# EAGLE board Qwiic_TMF8801-Panel (EAGLE 9.6.2), part 1 of 2
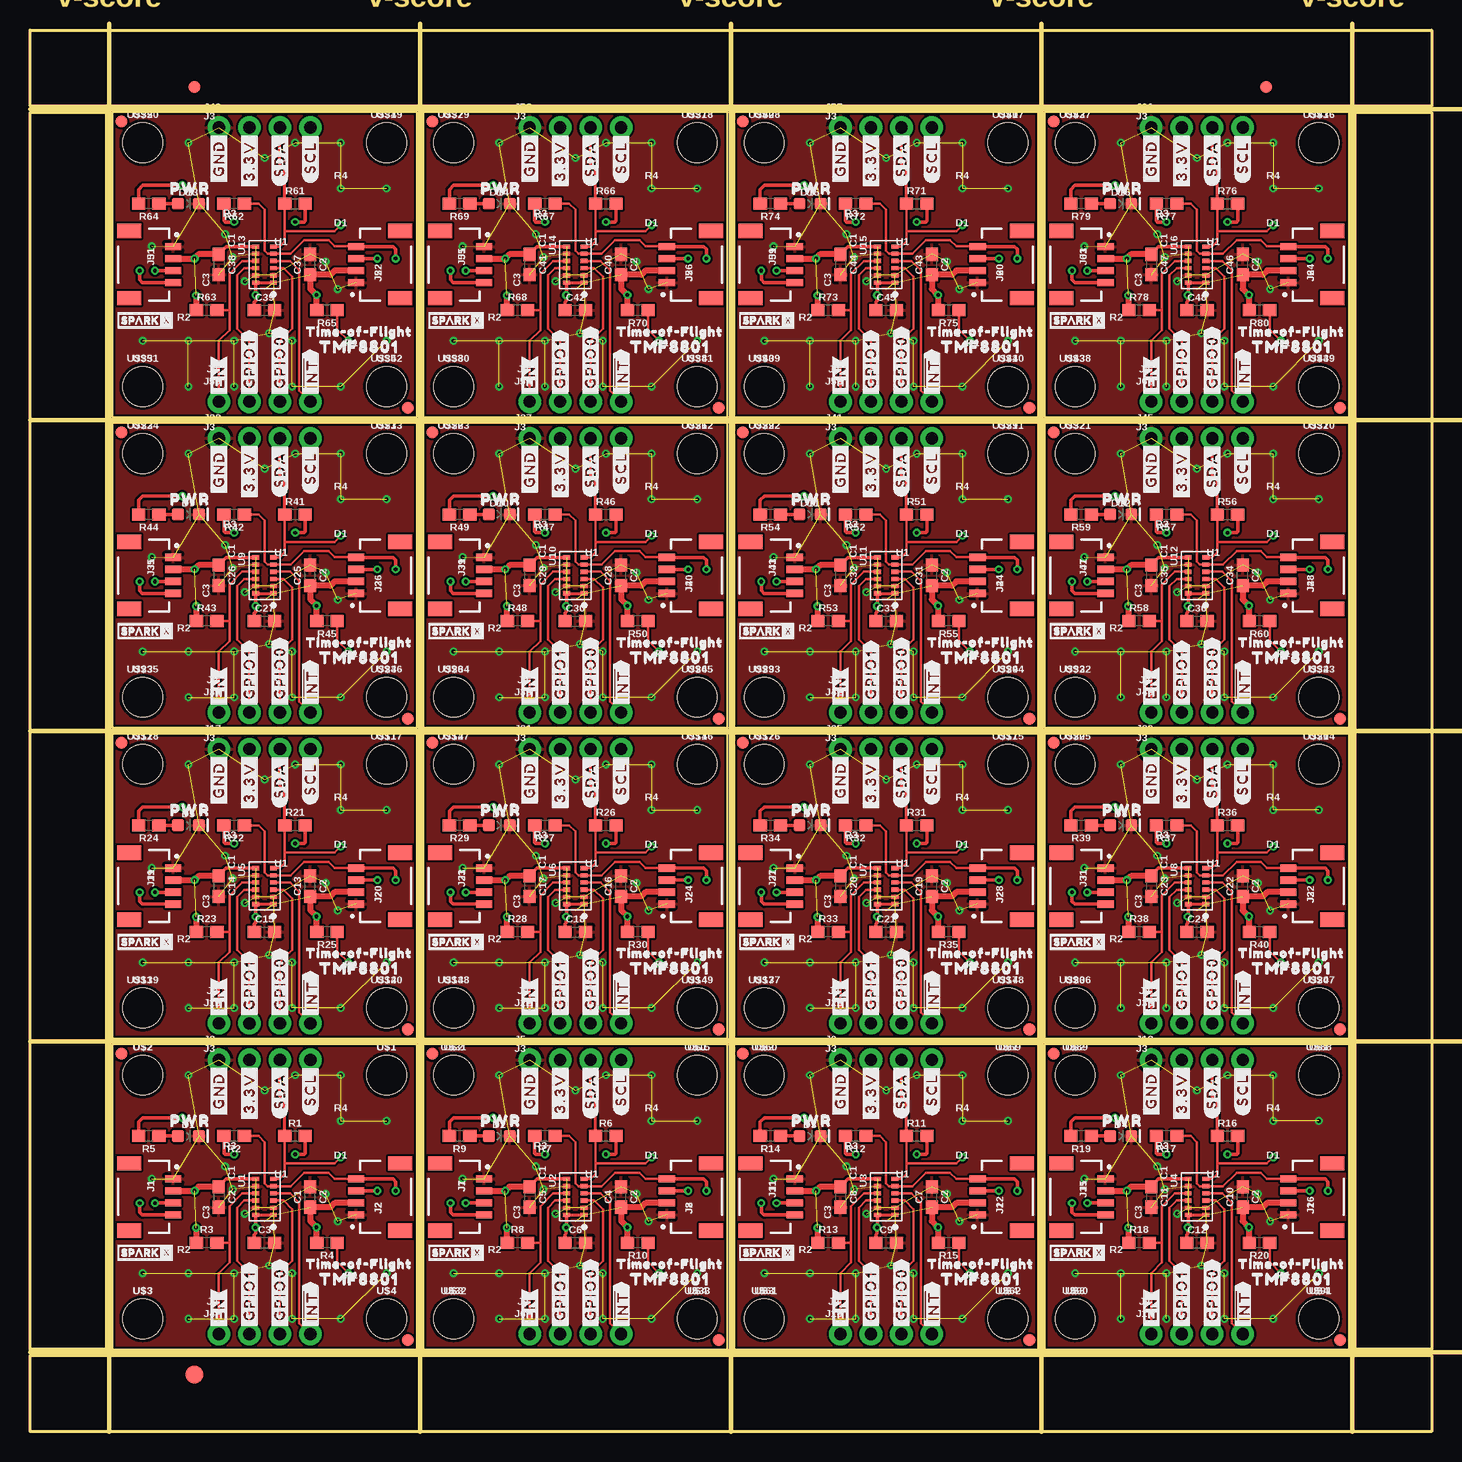
[diagram p0: board, top side]
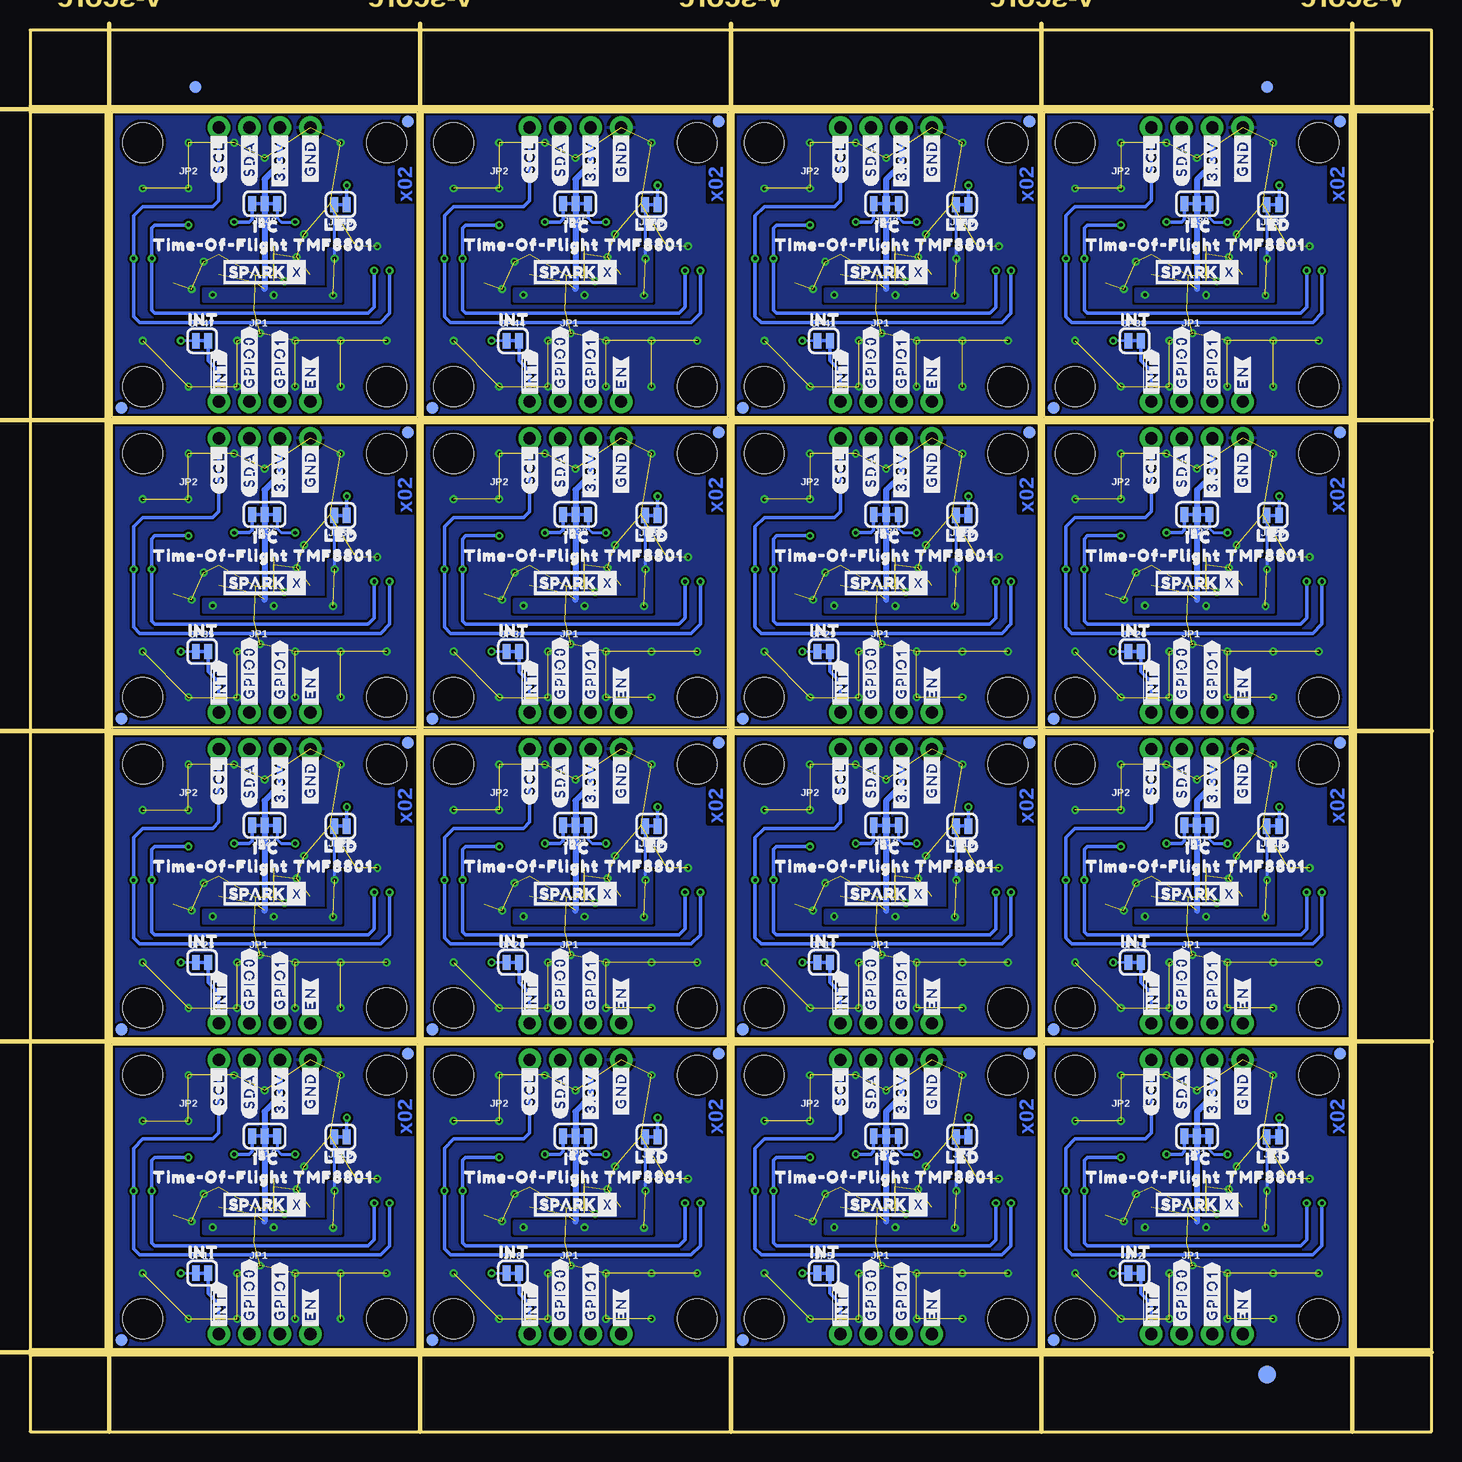
[diagram p1: board, bottom side, seen from below]

Size 116.84 x 116.84 mm. Coordinates in mm from the lower left corner, seen from the top.
Outline: 6.86,6.86 32.26,6.86 32.26,32.26 6.86,32.26 6.86,6.86
Outline: 32.77,6.86 58.17,6.86 58.17,32.26 32.77,32.26 32.77,6.86
Outline: 58.67,6.86 84.07,6.86 84.07,32.26 58.67,32.26 58.67,6.86
Outline: 84.58,6.86 109.98,6.86 109.98,32.26 84.58,32.26 84.58,6.86
Outline: 6.86,32.77 32.26,32.77 32.26,58.17 6.86,58.17 6.86,32.77
Outline: 32.77,32.77 58.17,32.77 58.17,58.17 32.77,58.17 32.77,32.77
Outline: 58.67,32.77 84.07,32.77 84.07,58.17 58.67,58.17 58.67,32.77
Outline: 84.58,32.77 109.98,32.77 109.98,58.17 84.58,58.17 84.58,32.77
Outline: 6.86,58.67 32.26,58.67 32.26,84.07 6.86,84.07 6.86,58.67
Outline: 32.77,58.67 58.17,58.67 58.17,84.07 32.77,84.07 32.77,58.67
Outline: 58.67,58.67 84.07,58.67 84.07,84.07 58.67,84.07 58.67,58.67
Outline: 84.58,58.67 109.98,58.67 109.98,84.07 84.58,84.07 84.58,58.67
Outline: 6.86,84.58 32.26,84.58 32.26,109.98 6.86,109.98 6.86,84.58
Outline: 32.77,84.58 58.17,84.58 58.17,109.98 32.77,109.98 32.77,84.58
Outline: 58.67,84.58 84.07,84.58 84.07,109.98 58.67,109.98 58.67,84.58
Outline: 84.58,84.58 109.98,84.58 109.98,109.98 84.58,109.98 84.58,84.58
Outline: 0,6.35 116.84,6.35 116.84,0 0,0 0,6.35
Outline: 110.49,109.98 116.84,109.98 116.84,6.86 110.49,6.86 110.49,109.98
Outline: 0,116.84 116.84,116.84 116.84,110.49 0,110.49 0,116.84
Outline: 0,109.98 6.35,109.98 6.35,6.86 0,6.86 0,109.98
Copper layers (1*16): Top 0.035mm / dielectric 1.5mm / Bottom 0.035mm
Design rules "Qwiic_TMF8801": minimum track width 7mil, minimum drill 12mil, track to track 7mil, track to pad 7mil, pad to pad 7mil, via to via 7mil, smd to smd 7mil, copper to edge 7mil, drill to drill 7mil, minimum pad ring 7mil, minimum via ring 7mil, stop-mask expansion 4mil, vias tented up to drill 25mil, thermal gap 10mil
Milling: 10 lines

## Footprints (pad centres in the part's own frame; a part is rotated, then mirrored left to right if it is on the bottom)
0603 = smd 1.1 x 1: 1 -0.85,0; 2 0.85,0
LED-0603 = smd 1 x 1: A -0.877,0; C 0.877,0
FIDUCIAL-1X2 = smd 1 x 1: 1 0,0
FIDUCIAL-1.5X3 = smd 1.5 x 1.5: 1 0,0
JST04_1MM_RA = smd 0.6 x 1.35: 1 -1.5,0; 2 -0.5,0; 3 0.5,0; 4 1.5,0 | smd 1.2 x 2: NC1 2.8,-3.675; NC2 -2.8,-3.675
1X04_NO_SILK = drill 1.016 pad 1.88: 1 0,0; 2 2.54,0; 3 5.08,0; 4 7.62,0
SMT-JUMPER_3_2-NC_TRACE_SILK = smd 0.66 x 1.27: 1 -1.041,0; 2 0,0; 3 1.041,0
SMT-JUMPER_2_NC_TRACE_SILK = smd 0.66 x 1.27: 1 -0.521,0; 2 0.521,0
TMF8801-CUSTOM = smd 0.35 x 0.575: 1 -1.5,-0.738; 2 -0.9,-0.738; 3 -0.3,-0.738; 4 0.3,-0.738; 5 0.9,-0.738; 6 1.5,-0.738; 7 1.5,0.738; 8 0.9,0.738; 9 0.3,0.738; 10 -0.3,0.738; 11 -0.9,0.738; 12 -1.5,0.738
STAND-OFF = hole 3.302: 0,0

## Placement (x,y rotation side)
C1  0.1uF  [0603]  23.37,19.56 90 top
C2  0.1uF  [0603]  15.75,19.56 270 top
C3  0.1uF  [0603]  19.56,15.75 0 top
C4  0.1uF  [0603]  49.28,19.56 90 top
C5  0.1uF  [0603]  41.66,19.56 270 top
C6  0.1uF  [0603]  45.47,15.75 0 top
C7  0.1uF  [0603]  75.18,19.56 90 top
C8  0.1uF  [0603]  67.56,19.56 270 top
C9  0.1uF  [0603]  71.37,15.75 0 top
C10  0.1uF  [0603]  101.09,19.56 90 top
C11  0.1uF  [0603]  93.47,19.56 270 top
C12  0.1uF  [0603]  97.28,15.75 0 top
C13  0.1uF  [0603]  23.37,45.47 90 top
C14  0.1uF  [0603]  15.75,45.47 270 top
C15  0.1uF  [0603]  19.56,41.66 0 top
C16  0.1uF  [0603]  49.28,45.47 90 top
C17  0.1uF  [0603]  41.66,45.47 270 top
C18  0.1uF  [0603]  45.47,41.66 0 top
C19  0.1uF  [0603]  75.18,45.47 90 top
C20  0.1uF  [0603]  67.56,45.47 270 top
C21  0.1uF  [0603]  71.37,41.66 0 top
C22  0.1uF  [0603]  101.09,45.47 90 top
C23  0.1uF  [0603]  93.47,45.47 270 top
C24  0.1uF  [0603]  97.28,41.66 0 top
C25  0.1uF  [0603]  23.37,71.37 90 top
C26  0.1uF  [0603]  15.75,71.37 270 top
C27  0.1uF  [0603]  19.56,67.56 0 top
C28  0.1uF  [0603]  49.28,71.37 90 top
C29  0.1uF  [0603]  41.66,71.37 270 top
C30  0.1uF  [0603]  45.47,67.56 0 top
C31  0.1uF  [0603]  75.18,71.37 90 top
C32  0.1uF  [0603]  67.56,71.37 270 top
C33  0.1uF  [0603]  71.37,67.56 0 top
C34  0.1uF  [0603]  101.09,71.37 90 top
C35  0.1uF  [0603]  93.47,71.37 270 top
C36  0.1uF  [0603]  97.28,67.56 0 top
C37  0.1uF  [0603]  23.37,97.28 90 top
C38  0.1uF  [0603]  15.75,97.28 270 top
C39  0.1uF  [0603]  19.56,93.47 0 top
C40  0.1uF  [0603]  49.28,97.28 90 top
C41  0.1uF  [0603]  41.66,97.28 270 top
C42  0.1uF  [0603]  45.47,93.47 0 top
C43  0.1uF  [0603]  75.18,97.28 90 top
C44  0.1uF  [0603]  67.56,97.28 270 top
C45  0.1uF  [0603]  71.37,93.47 0 top
C46  0.1uF  [0603]  101.09,97.28 90 top
C47  0.1uF  [0603]  93.47,97.28 270 top
C48  0.1uF  [0603]  97.28,93.47 0 top
D1  RED  [LED-0603]  13.21,24.64 0 top
D2  RED  [LED-0603]  39.12,24.64 0 top
D3  RED  [LED-0603]  65.02,24.64 0 top
D4  RED  [LED-0603]  90.93,24.64 0 top
D5  RED  [LED-0603]  13.21,50.55 0 top
D6  RED  [LED-0603]  39.12,50.55 0 top
D7  RED  [LED-0603]  65.02,50.55 0 top
D8  RED  [LED-0603]  90.93,50.55 0 top
D9  RED  [LED-0603]  13.21,76.45 0 top
D10  RED  [LED-0603]  39.12,76.45 0 top
D11  RED  [LED-0603]  65.02,76.45 0 top
D12  RED  [LED-0603]  90.93,76.45 0 top
D13  RED  [LED-0603]  13.21,102.36 0 top
D14  RED  [LED-0603]  39.12,102.36 0 top
D15  RED  [LED-0603]  65.02,102.36 0 top
D16  RED  [LED-0603]  90.93,102.36 0 top
E$1  [FIDUCIAL-1X2]  13.72,112.08 0 top
E$2  [FIDUCIAL-1X2]  13.72,112.08 0 bottom
E$3  [FIDUCIAL-1X2]  103.06,112.08 0 top
E$4  [FIDUCIAL-1X2]  103.06,112.08 0 bottom
E$5  [FIDUCIAL-1.5X3]  13.72,4.76 0 top
E$6  [FIDUCIAL-1.5X3]  13.72,4.76 0 bottom
FD1  FIDUCIAL1X2  [FIDUCIAL-1X2]  7.62,31.5 0 top
FD2  FIDUCIAL1X2  [FIDUCIAL-1X2]  7.62,31.5 0 bottom
FD3  FIDUCIAL1X2  [FIDUCIAL-1X2]  31.5,7.62 0 top
FD4  FIDUCIAL1X2  [FIDUCIAL-1X2]  31.5,7.62 0 bottom
FD5  FIDUCIAL1X2  [FIDUCIAL-1X2]  33.53,31.5 0 top
FD6  FIDUCIAL1X2  [FIDUCIAL-1X2]  57.4,7.62 0 top
FD7  FIDUCIAL1X2  [FIDUCIAL-1X2]  57.4,7.62 0 bottom
FD8  FIDUCIAL1X2  [FIDUCIAL-1X2]  33.53,31.5 0 bottom
FD9  FIDUCIAL1X2  [FIDUCIAL-1X2]  59.44,31.5 0 top
FD10  FIDUCIAL1X2  [FIDUCIAL-1X2]  83.31,7.62 0 top
FD11  FIDUCIAL1X2  [FIDUCIAL-1X2]  83.31,7.62 0 bottom
FD12  FIDUCIAL1X2  [FIDUCIAL-1X2]  59.44,31.5 0 bottom
FD13  FIDUCIAL1X2  [FIDUCIAL-1X2]  85.34,31.5 0 top
FD14  FIDUCIAL1X2  [FIDUCIAL-1X2]  109.22,7.62 0 top
FD15  FIDUCIAL1X2  [FIDUCIAL-1X2]  109.22,7.62 0 bottom
FD16  FIDUCIAL1X2  [FIDUCIAL-1X2]  85.34,31.5 0 bottom
FD17  FIDUCIAL1X2  [FIDUCIAL-1X2]  7.62,57.4 0 top
FD18  FIDUCIAL1X2  [FIDUCIAL-1X2]  31.5,33.53 0 top
FD19  FIDUCIAL1X2  [FIDUCIAL-1X2]  31.5,33.53 0 bottom
FD20  FIDUCIAL1X2  [FIDUCIAL-1X2]  7.62,57.4 0 bottom
FD21  FIDUCIAL1X2  [FIDUCIAL-1X2]  33.53,57.4 0 top
FD22  FIDUCIAL1X2  [FIDUCIAL-1X2]  57.4,33.53 0 top
FD23  FIDUCIAL1X2  [FIDUCIAL-1X2]  57.4,33.53 0 bottom
FD24  FIDUCIAL1X2  [FIDUCIAL-1X2]  33.53,57.4 0 bottom
FD25  FIDUCIAL1X2  [FIDUCIAL-1X2]  59.44,57.4 0 top
FD26  FIDUCIAL1X2  [FIDUCIAL-1X2]  83.31,33.53 0 top
FD27  FIDUCIAL1X2  [FIDUCIAL-1X2]  83.31,33.53 0 bottom
FD28  FIDUCIAL1X2  [FIDUCIAL-1X2]  59.44,57.4 0 bottom
FD29  FIDUCIAL1X2  [FIDUCIAL-1X2]  85.34,57.4 0 top
FD30  FIDUCIAL1X2  [FIDUCIAL-1X2]  109.22,33.53 0 top
FD31  FIDUCIAL1X2  [FIDUCIAL-1X2]  109.22,33.53 0 bottom
FD32  FIDUCIAL1X2  [FIDUCIAL-1X2]  85.34,57.4 0 bottom
FD33  FIDUCIAL1X2  [FIDUCIAL-1X2]  7.62,83.31 0 top
FD34  FIDUCIAL1X2  [FIDUCIAL-1X2]  31.5,59.44 0 top
FD35  FIDUCIAL1X2  [FIDUCIAL-1X2]  31.5,59.44 0 bottom
FD36  FIDUCIAL1X2  [FIDUCIAL-1X2]  7.62,83.31 0 bottom
FD37  FIDUCIAL1X2  [FIDUCIAL-1X2]  33.53,83.31 0 top
FD38  FIDUCIAL1X2  [FIDUCIAL-1X2]  57.4,59.44 0 top
FD39  FIDUCIAL1X2  [FIDUCIAL-1X2]  57.4,59.44 0 bottom
FD40  FIDUCIAL1X2  [FIDUCIAL-1X2]  33.53,83.31 0 bottom
FD41  FIDUCIAL1X2  [FIDUCIAL-1X2]  59.44,83.31 0 top
FD42  FIDUCIAL1X2  [FIDUCIAL-1X2]  83.31,59.44 0 top
FD43  FIDUCIAL1X2  [FIDUCIAL-1X2]  83.31,59.44 0 bottom
FD44  FIDUCIAL1X2  [FIDUCIAL-1X2]  59.44,83.31 0 bottom
FD45  FIDUCIAL1X2  [FIDUCIAL-1X2]  85.34,83.31 0 top
FD46  FIDUCIAL1X2  [FIDUCIAL-1X2]  109.22,59.44 0 top
FD47  FIDUCIAL1X2  [FIDUCIAL-1X2]  109.22,59.44 0 bottom
FD48  FIDUCIAL1X2  [FIDUCIAL-1X2]  85.34,83.31 0 bottom
FD49  FIDUCIAL1X2  [FIDUCIAL-1X2]  7.62,109.22 0 top
FD50  FIDUCIAL1X2  [FIDUCIAL-1X2]  31.5,85.34 0 top
FD51  FIDUCIAL1X2  [FIDUCIAL-1X2]  31.5,85.34 0 bottom
FD52  FIDUCIAL1X2  [FIDUCIAL-1X2]  7.62,109.22 0 bottom
FD53  FIDUCIAL1X2  [FIDUCIAL-1X2]  33.53,109.22 0 top
FD54  FIDUCIAL1X2  [FIDUCIAL-1X2]  57.4,85.34 0 top
FD55  FIDUCIAL1X2  [FIDUCIAL-1X2]  57.4,85.34 0 bottom
FD56  FIDUCIAL1X2  [FIDUCIAL-1X2]  33.53,109.22 0 bottom
FD57  FIDUCIAL1X2  [FIDUCIAL-1X2]  59.44,109.22 0 top
FD58  FIDUCIAL1X2  [FIDUCIAL-1X2]  83.31,85.34 0 top
FD59  FIDUCIAL1X2  [FIDUCIAL-1X2]  83.31,85.34 0 bottom
FD60  FIDUCIAL1X2  [FIDUCIAL-1X2]  59.44,109.22 0 bottom
FD61  FIDUCIAL1X2  [FIDUCIAL-1X2]  85.34,109.22 0 top
FD62  FIDUCIAL1X2  [FIDUCIAL-1X2]  109.22,85.34 0 top
FD63  FIDUCIAL1X2  [FIDUCIAL-1X2]  109.22,85.34 0 bottom
FD64  FIDUCIAL1X2  [FIDUCIAL-1X2]  85.34,109.22 0 bottom
FRAME1  FRAME-LETTERNO_PACKAGE  [DUMMY]  6.6,6.35 0 top
FRAME2  FRAME-LETTERNO_PACKAGE  [DUMMY]  32.51,6.35 0 top
FRAME3  FRAME-LETTERNO_PACKAGE  [DUMMY]  58.42,6.35 0 top
FRAME4  FRAME-LETTERNO_PACKAGE  [DUMMY]  84.33,6.35 0 top
FRAME5  FRAME-LETTERNO_PACKAGE  [DUMMY]  6.6,32.26 0 top
FRAME6  FRAME-LETTERNO_PACKAGE  [DUMMY]  32.51,32.26 0 top
FRAME7  FRAME-LETTERNO_PACKAGE  [DUMMY]  58.42,32.26 0 top
FRAME8  FRAME-LETTERNO_PACKAGE  [DUMMY]  84.33,32.26 0 top
FRAME9  FRAME-LETTERNO_PACKAGE  [DUMMY]  6.6,58.17 0 top
FRAME10  FRAME-LETTERNO_PACKAGE  [DUMMY]  32.51,58.17 0 top
FRAME11  FRAME-LETTERNO_PACKAGE  [DUMMY]  58.42,58.17 0 top
FRAME12  FRAME-LETTERNO_PACKAGE  [DUMMY]  84.33,58.17 0 top
FRAME13  FRAME-LETTERNO_PACKAGE  [DUMMY]  6.6,84.07 0 top
FRAME14  FRAME-LETTERNO_PACKAGE  [DUMMY]  32.51,84.07 0 top
FRAME15  FRAME-LETTERNO_PACKAGE  [DUMMY]  58.42,84.07 0 top
FRAME16  FRAME-LETTERNO_PACKAGE  [DUMMY]  84.33,84.07 0 top
J1  Qwiic  [JST04_1MM_RA]  11.94,19.56 270 top
J2  Qwiic  [JST04_1MM_RA]  27.18,19.56 90 top
J3  [1X04_NO_SILK]  15.75,30.99 0 top
J4  [1X04_NO_SILK]  15.75,8.13 0 top
J5  [1X04_NO_SILK]  41.66,30.99 0 top
J6  [1X04_NO_SILK]  41.66,8.13 0 top
J7  Qwiic  [JST04_1MM_RA]  37.85,19.56 270 top
J8  Qwiic  [JST04_1MM_RA]  53.09,19.56 90 top
J9  [1X04_NO_SILK]  67.56,30.99 0 top
J10  [1X04_NO_SILK]  67.56,8.13 0 top
J11  Qwiic  [JST04_1MM_RA]  63.75,19.56 270 top
J12  Qwiic  [JST04_1MM_RA]  78.99,19.56 90 top
J13  [1X04_NO_SILK]  93.47,30.99 0 top
J14  [1X04_NO_SILK]  93.47,8.13 0 top
J15  Qwiic  [JST04_1MM_RA]  89.66,19.56 270 top
J16  Qwiic  [JST04_1MM_RA]  104.9,19.56 90 top
J17  [1X04_NO_SILK]  15.75,56.9 0 top
J18  [1X04_NO_SILK]  15.75,34.04 0 top
J19  Qwiic  [JST04_1MM_RA]  11.94,45.47 270 top
J20  Qwiic  [JST04_1MM_RA]  27.18,45.47 90 top
J21  [1X04_NO_SILK]  41.66,56.9 0 top
J22  [1X04_NO_SILK]  41.66,34.04 0 top
J23  Qwiic  [JST04_1MM_RA]  37.85,45.47 270 top
J24  Qwiic  [JST04_1MM_RA]  53.09,45.47 90 top
J25  [1X04_NO_SILK]  67.56,56.9 0 top
J26  [1X04_NO_SILK]  67.56,34.04 0 top
J27  Qwiic  [JST04_1MM_RA]  63.75,45.47 270 top
J28  Qwiic  [JST04_1MM_RA]  78.99,45.47 90 top
J29  [1X04_NO_SILK]  93.47,56.9 0 top
J30  [1X04_NO_SILK]  93.47,34.04 0 top
J31  Qwiic  [JST04_1MM_RA]  89.66,45.47 270 top
J32  Qwiic  [JST04_1MM_RA]  104.9,45.47 90 top
J33  [1X04_NO_SILK]  15.75,82.8 0 top
J34  [1X04_NO_SILK]  15.75,59.94 0 top
J35  Qwiic  [JST04_1MM_RA]  11.94,71.37 270 top
J36  Qwiic  [JST04_1MM_RA]  27.18,71.37 90 top
J37  [1X04_NO_SILK]  41.66,82.8 0 top
J38  [1X04_NO_SILK]  41.66,59.94 0 top
J39  Qwiic  [JST04_1MM_RA]  37.85,71.37 270 top
J40  Qwiic  [JST04_1MM_RA]  53.09,71.37 90 top
J41  [1X04_NO_SILK]  67.56,82.8 0 top
J42  [1X04_NO_SILK]  67.56,59.94 0 top
J43  Qwiic  [JST04_1MM_RA]  63.75,71.37 270 top
J44  Qwiic  [JST04_1MM_RA]  78.99,71.37 90 top
J45  [1X04_NO_SILK]  93.47,82.8 0 top
J46  [1X04_NO_SILK]  93.47,59.94 0 top
J47  Qwiic  [JST04_1MM_RA]  89.66,71.37 270 top
J48  Qwiic  [JST04_1MM_RA]  104.9,71.37 90 top
J49  [1X04_NO_SILK]  15.75,108.71 0 top
J50  [1X04_NO_SILK]  15.75,85.85 0 top
J51  Qwiic  [JST04_1MM_RA]  11.94,97.28 270 top
J52  Qwiic  [JST04_1MM_RA]  27.18,97.28 90 top
J53  [1X04_NO_SILK]  41.66,108.71 0 top
J54  [1X04_NO_SILK]  41.66,85.85 0 top
J55  Qwiic  [JST04_1MM_RA]  37.85,97.28 270 top
J56  Qwiic  [JST04_1MM_RA]  53.09,97.28 90 top
J57  [1X04_NO_SILK]  67.56,108.71 0 top
J58  [1X04_NO_SILK]  67.56,85.85 0 top
J59  Qwiic  [JST04_1MM_RA]  63.75,97.28 270 top
J60  Qwiic  [JST04_1MM_RA]  78.99,97.28 90 top
J61  [1X04_NO_SILK]  93.47,108.71 0 top
J62  [1X04_NO_SILK]  93.47,85.85 0 top
J63  Qwiic  [JST04_1MM_RA]  89.66,97.28 270 top
J64  Qwiic  [JST04_1MM_RA]  104.9,97.28 90 top
JP1  JUMPER-SMT_3_2-NC_TRACE_SILK  [SMT-JUMPER_3_2-NC_TRACE_SILK]  19.56,24.64 180 bottom
JP2  JUMPER-SMT_2_NC_TRACE_SILK  [SMT-JUMPER_2_NC_TRACE_SILK]  24.77,13.21 0 bottom
JP3  JUMPER-SMT_2_NC_TRACE_SILK  [SMT-JUMPER_2_NC_TRACE_SILK]  13.23,24.56 180 bottom
JP4  JUMPER-SMT_2_NC_TRACE_SILK  [SMT-JUMPER_2_NC_TRACE_SILK]  39.14,24.56 180 bottom
JP5  JUMPER-SMT_2_NC_TRACE_SILK  [SMT-JUMPER_2_NC_TRACE_SILK]  50.67,13.21 0 bottom
JP6  JUMPER-SMT_3_2-NC_TRACE_SILK  [SMT-JUMPER_3_2-NC_TRACE_SILK]  45.47,24.64 180 bottom
JP7  JUMPER-SMT_2_NC_TRACE_SILK  [SMT-JUMPER_2_NC_TRACE_SILK]  65.05,24.56 180 bottom
JP8  JUMPER-SMT_2_NC_TRACE_SILK  [SMT-JUMPER_2_NC_TRACE_SILK]  76.58,13.21 0 bottom
JP9  JUMPER-SMT_3_2-NC_TRACE_SILK  [SMT-JUMPER_3_2-NC_TRACE_SILK]  71.37,24.64 180 bottom
JP10  JUMPER-SMT_2_NC_TRACE_SILK  [SMT-JUMPER_2_NC_TRACE_SILK]  90.96,24.56 180 bottom
JP11  JUMPER-SMT_2_NC_TRACE_SILK  [SMT-JUMPER_2_NC_TRACE_SILK]  102.49,13.21 0 bottom
JP12  JUMPER-SMT_3_2-NC_TRACE_SILK  [SMT-JUMPER_3_2-NC_TRACE_SILK]  97.28,24.64 180 bottom
JP13  JUMPER-SMT_2_NC_TRACE_SILK  [SMT-JUMPER_2_NC_TRACE_SILK]  13.23,50.47 180 bottom
JP14  JUMPER-SMT_2_NC_TRACE_SILK  [SMT-JUMPER_2_NC_TRACE_SILK]  24.77,39.12 0 bottom
JP15  JUMPER-SMT_3_2-NC_TRACE_SILK  [SMT-JUMPER_3_2-NC_TRACE_SILK]  19.56,50.55 180 bottom
JP16  JUMPER-SMT_2_NC_TRACE_SILK  [SMT-JUMPER_2_NC_TRACE_SILK]  39.14,50.47 180 bottom
JP17  JUMPER-SMT_2_NC_TRACE_SILK  [SMT-JUMPER_2_NC_TRACE_SILK]  50.67,39.12 0 bottom
JP18  JUMPER-SMT_3_2-NC_TRACE_SILK  [SMT-JUMPER_3_2-NC_TRACE_SILK]  45.47,50.55 180 bottom
JP19  JUMPER-SMT_2_NC_TRACE_SILK  [SMT-JUMPER_2_NC_TRACE_SILK]  65.05,50.47 180 bottom
JP20  JUMPER-SMT_2_NC_TRACE_SILK  [SMT-JUMPER_2_NC_TRACE_SILK]  76.58,39.12 0 bottom
JP21  JUMPER-SMT_3_2-NC_TRACE_SILK  [SMT-JUMPER_3_2-NC_TRACE_SILK]  71.37,50.55 180 bottom
JP22  JUMPER-SMT_2_NC_TRACE_SILK  [SMT-JUMPER_2_NC_TRACE_SILK]  90.96,50.47 180 bottom
JP23  JUMPER-SMT_2_NC_TRACE_SILK  [SMT-JUMPER_2_NC_TRACE_SILK]  102.49,39.12 0 bottom
JP24  JUMPER-SMT_3_2-NC_TRACE_SILK  [SMT-JUMPER_3_2-NC_TRACE_SILK]  97.28,50.55 180 bottom
JP25  JUMPER-SMT_2_NC_TRACE_SILK  [SMT-JUMPER_2_NC_TRACE_SILK]  13.23,76.38 180 bottom
JP26  JUMPER-SMT_2_NC_TRACE_SILK  [SMT-JUMPER_2_NC_TRACE_SILK]  24.77,65.02 0 bottom
JP27  JUMPER-SMT_3_2-NC_TRACE_SILK  [SMT-JUMPER_3_2-NC_TRACE_SILK]  19.56,76.45 180 bottom
JP28  JUMPER-SMT_2_NC_TRACE_SILK  [SMT-JUMPER_2_NC_TRACE_SILK]  39.14,76.38 180 bottom
JP29  JUMPER-SMT_2_NC_TRACE_SILK  [SMT-JUMPER_2_NC_TRACE_SILK]  50.67,65.02 0 bottom
JP30  JUMPER-SMT_3_2-NC_TRACE_SILK  [SMT-JUMPER_3_2-NC_TRACE_SILK]  45.47,76.45 180 bottom
JP31  JUMPER-SMT_2_NC_TRACE_SILK  [SMT-JUMPER_2_NC_TRACE_SILK]  65.05,76.38 180 bottom
JP32  JUMPER-SMT_2_NC_TRACE_SILK  [SMT-JUMPER_2_NC_TRACE_SILK]  76.58,65.02 0 bottom
JP33  JUMPER-SMT_3_2-NC_TRACE_SILK  [SMT-JUMPER_3_2-NC_TRACE_SILK]  71.37,76.45 180 bottom
JP34  JUMPER-SMT_2_NC_TRACE_SILK  [SMT-JUMPER_2_NC_TRACE_SILK]  90.96,76.38 180 bottom
JP35  JUMPER-SMT_2_NC_TRACE_SILK  [SMT-JUMPER_2_NC_TRACE_SILK]  102.49,65.02 0 bottom
JP36  JUMPER-SMT_3_2-NC_TRACE_SILK  [SMT-JUMPER_3_2-NC_TRACE_SILK]  97.28,76.45 180 bottom
JP37  JUMPER-SMT_2_NC_TRACE_SILK  [SMT-JUMPER_2_NC_TRACE_SILK]  13.23,102.29 180 bottom
JP38  JUMPER-SMT_2_NC_TRACE_SILK  [SMT-JUMPER_2_NC_TRACE_SILK]  24.77,90.93 0 bottom
JP39  JUMPER-SMT_3_2-NC_TRACE_SILK  [SMT-JUMPER_3_2-NC_TRACE_SILK]  19.56,102.36 180 bottom
JP40  JUMPER-SMT_2_NC_TRACE_SILK  [SMT-JUMPER_2_NC_TRACE_SILK]  39.14,102.29 180 bottom
JP41  JUMPER-SMT_2_NC_TRACE_SILK  [SMT-JUMPER_2_NC_TRACE_SILK]  50.67,90.93 0 bottom
JP42  JUMPER-SMT_3_2-NC_TRACE_SILK  [SMT-JUMPER_3_2-NC_TRACE_SILK]  45.47,102.36 180 bottom
JP43  JUMPER-SMT_2_NC_TRACE_SILK  [SMT-JUMPER_2_NC_TRACE_SILK]  65.05,102.29 180 bottom
JP44  JUMPER-SMT_2_NC_TRACE_SILK  [SMT-JUMPER_2_NC_TRACE_SILK]  76.58,90.93 0 bottom
JP45  JUMPER-SMT_3_2-NC_TRACE_SILK  [SMT-JUMPER_3_2-NC_TRACE_SILK]  71.37,102.36 180 bottom
JP46  JUMPER-SMT_2_NC_TRACE_SILK  [SMT-JUMPER_2_NC_TRACE_SILK]  90.96,102.29 180 bottom
JP47  JUMPER-SMT_2_NC_TRACE_SILK  [SMT-JUMPER_2_NC_TRACE_SILK]  102.49,90.93 0 bottom
JP48  JUMPER-SMT_3_2-NC_TRACE_SILK  [SMT-JUMPER_3_2-NC_TRACE_SILK]  97.28,102.36 180 bottom
R1  2.2k  [0603]  22.1,24.64 0 top
R2  2.2k  [0603]  17.02,24.64 180 top
R3  10k  [0603]  14.73,15.75 180 top
R4  10k  [0603]  24.77,15.75 180 top
R5  1k  [0603]  9.91,24.64 180 top
R6  2.2k  [0603]  48.01,24.64 0 top
R7  2.2k  [0603]  42.93,24.64 180 top
R8  10k  [0603]  40.64,15.75 180 top
R9  1k  [0603]  35.81,24.64 180 top
R10  10k  [0603]  50.67,15.75 180 top
R11  2.2k  [0603]  73.91,24.64 0 top
R12  2.2k  [0603]  68.83,24.64 180 top
R13  10k  [0603]  66.55,15.75 180 top
R14  1k  [0603]  61.72,24.64 180 top
R15  10k  [0603]  76.58,15.75 180 top
R16  2.2k  [0603]  99.82,24.64 0 top
R17  2.2k  [0603]  94.74,24.64 180 top
R18  10k  [0603]  92.46,15.75 180 top
R19  1k  [0603]  87.63,24.64 180 top
R20  10k  [0603]  102.49,15.75 180 top
R21  2.2k  [0603]  22.1,50.55 0 top
R22  2.2k  [0603]  17.02,50.55 180 top
R23  10k  [0603]  14.73,41.66 180 top
R24  1k  [0603]  9.91,50.55 180 top
R25  10k  [0603]  24.77,41.66 180 top
R26  2.2k  [0603]  48.01,50.55 0 top
R27  2.2k  [0603]  42.93,50.55 180 top
R28  10k  [0603]  40.64,41.66 180 top
R29  1k  [0603]  35.81,50.55 180 top
R30  10k  [0603]  50.67,41.66 180 top
R31  2.2k  [0603]  73.91,50.55 0 top
R32  2.2k  [0603]  68.83,50.55 180 top
R33  10k  [0603]  66.55,41.66 180 top
R34  1k  [0603]  61.72,50.55 180 top
R35  10k  [0603]  76.58,41.66 180 top
R36  2.2k  [0603]  99.82,50.55 0 top
R37  2.2k  [0603]  94.74,50.55 180 top
R38  10k  [0603]  92.46,41.66 180 top
R39  1k  [0603]  87.63,50.55 180 top
R40  10k  [0603]  102.49,41.66 180 top
R41  2.2k  [0603]  22.1,76.45 0 top
R42  2.2k  [0603]  17.02,76.45 180 top
R43  10k  [0603]  14.73,67.56 180 top
R44  1k  [0603]  9.91,76.45 180 top
R45  10k  [0603]  24.77,67.56 180 top
R46  2.2k  [0603]  48.01,76.45 0 top
R47  2.2k  [0603]  42.93,76.45 180 top
R48  10k  [0603]  40.64,67.56 180 top
R49  1k  [0603]  35.81,76.45 180 top
R50  10k  [0603]  50.67,67.56 180 top
R51  2.2k  [0603]  73.91,76.45 0 top
R52  2.2k  [0603]  68.83,76.45 180 top
R53  10k  [0603]  66.55,67.56 180 top
R54  1k  [0603]  61.72,76.45 180 top
R55  10k  [0603]  76.58,67.56 180 top
R56  2.2k  [0603]  99.82,76.45 0 top
R57  2.2k  [0603]  94.74,76.45 180 top
R58  10k  [0603]  92.46,67.56 180 top
R59  1k  [0603]  87.63,76.45 180 top
R60  10k  [0603]  102.49,67.56 180 top
R61  2.2k  [0603]  22.1,102.36 0 top
R62  2.2k  [0603]  17.02,102.36 180 top
R63  10k  [0603]  14.73,93.47 180 top
R64  1k  [0603]  9.91,102.36 180 top
R65  10k  [0603]  24.77,93.47 180 top
R66  2.2k  [0603]  48.01,102.36 0 top
R67  2.2k  [0603]  42.93,102.36 180 top
R68  10k  [0603]  40.64,93.47 180 top
R69  1k  [0603]  35.81,102.36 180 top
R70  10k  [0603]  50.67,93.47 180 top
R71  2.2k  [0603]  73.91,102.36 0 top
R72  2.2k  [0603]  68.83,102.36 180 top
R73  10k  [0603]  66.55,93.47 180 top
R74  1k  [0603]  61.72,102.36 180 top
R75  10k  [0603]  76.58,93.47 180 top
R76  2.2k  [0603]  99.82,102.36 0 top
R77  2.2k  [0603]  94.74,102.36 180 top
R78  10k  [0603]  92.46,93.47 180 top
R79  1k  [0603]  87.63,102.36 180 top
R80  10k  [0603]  102.49,93.47 180 top
U1  TMF8801  [TMF8801-CUSTOM]  19.56,19.56 90 top
U2  TMF8801  [TMF8801-CUSTOM]  45.47,19.56 90 top
U3  TMF8801  [TMF8801-CUSTOM]  71.37,19.56 90 top
U4  TMF8801  [TMF8801-CUSTOM]  97.28,19.56 90 top
U5  TMF8801  [TMF8801-CUSTOM]  19.56,45.47 90 top
U6  TMF8801  [TMF8801-CUSTOM]  45.47,45.47 90 top
U7  TMF8801  [TMF8801-CUSTOM]  71.37,45.47 90 top
U8  TMF8801  [TMF8801-CUSTOM]  97.28,45.47 90 top
U9  TMF8801  [TMF8801-CUSTOM]  19.56,71.37 90 top
U10  TMF8801  [TMF8801-CUSTOM]  45.47,71.37 90 top
U11  TMF8801  [TMF8801-CUSTOM]  71.37,71.37 90 top
U12  TMF8801  [TMF8801-CUSTOM]  97.28,71.37 90 top
U13  TMF8801  [TMF8801-CUSTOM]  19.56,97.28 90 top
U14  TMF8801  [TMF8801-CUSTOM]  45.47,97.28 90 top
U15  TMF8801  [TMF8801-CUSTOM]  71.37,97.28 90 top
U16  TMF8801  [TMF8801-CUSTOM]  97.28,97.28 90 top
U$1  [STAND-OFF]  29.72,29.72 0 top
U$2  [STAND-OFF]  9.4,29.72 0 top
U$3  [STAND-OFF]  9.4,9.4 0 top
U$4  [STAND-OFF]  29.72,9.4 0 top
U$5  [#3#3V#1]  18.29,25.78 90 top
U$6  [#SDA#4]  20.83,26.16 90 top
U$7  [#GND#0]  15.75,26.16 90 top
U$8  [##INT##7]  23.38,8.52 90 top
U$9  [#GPIO0#7]  20.83,8.51 90 top
U$10  [#GPIO1#7]  18.29,8.51 90 top
U$11  [#EN#6]  15.75,8.51 90 top
U$12  [#INT0]  24.64,15.11 0 bottom
U$13  [TMF88010]  27.43,12.7 0 top
U$14  [TIME#OF#FLIGHT0]  27.43,13.97 0 top
U$15  [STAND-OFF]  55.63,29.72 0 top
U$16  [TIME#OF#FLIGHT_TMF88018]  19.68,21.21 0 bottom
U$17  [#3#3V#1]  18.29,25.78 90 bottom
U$18  [#GND#0]  15.75,26.16 90 bottom
U$19  [#SDA#4]  20.83,26.16 90 bottom
U$20  [SPARKX-TINY]  9.6,14.91 0 top
U$21  [#SCL#5]  23.37,26.42 90 top
U$22  [#SCL#5]  23.37,26.42 90 bottom
U$23  [#EN#6]  15.75,8.51 90 bottom
U$24  [##INT##7]  23.37,8.51 90 bottom
U$25  [#GPIO0#7]  20.83,8.51 90 bottom
U$26  [#GPIO1#7]  18.29,8.51 90 bottom
U$27  [SPARKX-SMALL]  19.56,18.92 0 bottom
U$28  [I�C0]  19.43,22.73 0 bottom
U$29  [LED1]  13.18,22.89 0 bottom
U$30  [PWR2]  13.34,25.91 0 top
U$31  [STAND-OFF]  35.31,29.72 0 top
U$32  [STAND-OFF]  35.31,9.4 0 top
U$33  [STAND-OFF]  55.63,9.4 0 top
U$34  [SPARKX-TINY]  35.51,14.91 0 top
U$35  [SPARKX-SMALL]  45.47,18.92 0 bottom
U$36  [#3#3V#1]  44.2,25.78 90 top
U$37  [#GND#0]  41.66,26.16 90 top
U$38  [#SDA#4]  46.74,26.16 90 top
U$39  [##INT##7]  49.28,8.52 90 top
U$40  [#GPIO0#7]  46.74,8.51 90 top
U$41  [#GPIO1#7]  44.2,8.51 90 top
U$42  [#EN#6]  41.66,8.51 90 top
U$43  [TIME#OF#FLIGHT_TMF88018]  45.59,21.21 0 bottom
U$44  [#3#3V#1]  44.2,25.78 90 bottom
U$45  [#GND#0]  41.66,26.16 90 bottom
U$46  [#SDA#4]  46.74,26.16 90 bottom
U$47  [#SCL#5]  49.28,26.42 90 top
U$48  [#SCL#5]  49.28,26.42 90 bottom
U$49  [#EN#6]  41.66,8.51 90 bottom
U$50  [##INT##7]  49.28,8.51 90 bottom
U$51  [#GPIO0#7]  46.74,8.51 90 bottom
U$52  [#GPIO1#7]  44.2,8.51 90 bottom
U$53  [I�C0]  45.34,22.73 0 bottom
U$54  [LED1]  39.09,22.89 0 bottom
U$55  [PWR2]  39.24,25.91 0 top
U$56  [#INT0]  50.55,15.11 0 bottom
U$57  [TMF88010]  53.34,12.7 0 top
U$58  [TIME#OF#FLIGHT0]  53.34,13.97 0 top
U$59  [STAND-OFF]  81.53,29.72 0 top
U$60  [STAND-OFF]  61.21,29.72 0 top
U$61  [STAND-OFF]  61.21,9.4 0 top
U$62  [STAND-OFF]  81.53,9.4 0 top
U$63  [SPARKX-TINY]  61.42,14.91 0 top
U$64  [SPARKX-SMALL]  71.37,18.92 0 bottom
U$65  [#3#3V#1]  70.1,25.78 90 top
U$66  [#GND#0]  67.56,26.16 90 top
U$67  [#SDA#4]  72.64,26.16 90 top
U$68  [##INT##7]  75.19,8.52 90 top
U$69  [#GPIO0#7]  72.64,8.51 90 top
U$70  [#GPIO1#7]  70.1,8.51 90 top
U$71  [#EN#6]  67.56,8.51 90 top
U$72  [TIME#OF#FLIGHT_TMF88018]  71.5,21.21 0 bottom
U$73  [#3#3V#1]  70.1,25.78 90 bottom
U$74  [#GND#0]  67.56,26.16 90 bottom
U$75  [#SDA#4]  72.64,26.16 90 bottom
U$76  [#SCL#5]  75.18,26.42 90 top
U$77  [#SCL#5]  75.18,26.42 90 bottom
U$78  [#EN#6]  67.56,8.51 90 bottom
U$79  [##INT##7]  75.18,8.51 90 bottom
U$80  [#GPIO0#7]  72.64,8.51 90 bottom
U$81  [#GPIO1#7]  70.1,8.51 90 bottom
U$82  [I�C0]  71.25,22.73 0 bottom
U$83  [LED1]  65,22.89 0 bottom
U$84  [PWR2]  65.15,25.91 0 top
U$85  [#INT0]  76.45,15.11 0 bottom
U$86  [TMF88010]  79.25,12.7 0 top
U$87  [TIME#OF#FLIGHT0]  79.25,13.97 0 top
U$88  [STAND-OFF]  107.44,29.72 0 top
U$89  [STAND-OFF]  87.12,29.72 0 top
U$90  [STAND-OFF]  87.12,9.4 0 top
U$91  [STAND-OFF]  107.44,9.4 0 top
U$92  [SPARKX-TINY]  87.33,14.91 0 top
U$93  [SPARKX-SMALL]  97.28,18.92 0 bottom
U$94  [#3#3V#1]  96.01,25.78 90 top
U$95  [#GND#0]  93.47,26.16 90 top
U$96  [#SDA#4]  98.55,26.16 90 top
U$97  [##INT##7]  101.1,8.52 90 top
U$98  [#GPIO0#7]  98.55,8.51 90 top
U$99  [#GPIO1#7]  96.01,8.51 90 top
U$100  [#EN#6]  93.47,8.51 90 top
U$101  [TIME#OF#FLIGHT_TMF88018]  97.41,21.21 0 bottom
U$102  [#3#3V#1]  96.01,25.78 90 bottom
U$103  [#GND#0]  93.47,26.16 90 bottom
U$104  [#SDA#4]  98.55,26.16 90 bottom
U$105  [#SCL#5]  101.09,26.42 90 top
U$106  [#SCL#5]  101.09,26.42 90 bottom
U$107  [#EN#6]  93.47,8.51 90 bottom
U$108  [##INT##7]  101.09,8.51 90 bottom
U$109  [#GPIO0#7]  98.55,8.51 90 bottom
U$110  [#GPIO1#7]  96.01,8.51 90 bottom
U$111  [I�C0]  97.16,22.73 0 bottom
U$112  [LED1]  90.91,22.89 0 bottom
U$113  [PWR2]  91.06,25.91 0 top
U$114  [#INT0]  102.36,15.11 0 bottom
U$115  [TMF88010]  105.16,12.7 0 top
U$116  [TIME#OF#FLIGHT0]  105.16,13.97 0 top
U$117  [STAND-OFF]  29.72,55.63 0 top
U$118  [STAND-OFF]  9.4,55.63 0 top
U$119  [STAND-OFF]  9.4,35.31 0 top
U$120  [STAND-OFF]  29.72,35.31 0 top
U$121  [SPARKX-TINY]  9.6,40.82 0 top
U$122  [SPARKX-SMALL]  19.56,44.83 0 bottom
U$123  [#3#3V#1]  18.29,51.69 90 top
U$124  [#GND#0]  15.75,52.07 90 top
U$125  [#SDA#4]  20.83,52.07 90 top
U$126  [##INT##7]  23.38,34.43 90 top
U$127  [#GPIO0#7]  20.83,34.42 90 top
U$128  [#GPIO1#7]  18.29,34.42 90 top
U$129  [#EN#6]  15.75,34.42 90 top
U$130  [TIME#OF#FLIGHT_TMF88018]  19.68,47.12 0 bottom
U$131  [#3#3V#1]  18.29,51.69 90 bottom
U$132  [#GND#0]  15.75,52.07 90 bottom
U$133  [#SDA#4]  20.83,52.07 90 bottom
U$134  [#SCL#5]  23.37,52.32 90 top
U$135  [#SCL#5]  23.37,52.32 90 bottom
U$136  [#EN#6]  15.75,34.42 90 bottom
U$137  [##INT##7]  23.37,34.42 90 bottom
U$138  [#GPIO0#7]  20.83,34.42 90 bottom
U$139  [#GPIO1#7]  18.29,34.42 90 bottom
U$140  [I�C0]  19.43,48.64 0 bottom
U$141  [LED1]  13.18,48.79 0 bottom
U$142  [PWR2]  13.34,51.82 0 top
U$143  [#INT0]  24.64,41.02 0 bottom
U$144  [TMF88010]  27.43,38.61 0 top
U$145  [TIME#OF#FLIGHT0]  27.43,39.88 0 top
U$146  [STAND-OFF]  55.63,55.63 0 top
U$147  [STAND-OFF]  35.31,55.63 0 top
U$148  [STAND-OFF]  35.31,35.31 0 top
U$149  [STAND-OFF]  55.63,35.31 0 top
U$150  [SPARKX-TINY]  35.51,40.82 0 top
U$151  [SPARKX-SMALL]  45.47,44.83 0 bottom
U$152  [#3#3V#1]  44.2,51.69 90 top
U$153  [#GND#0]  41.66,52.07 90 top
U$154  [#SDA#4]  46.74,52.07 90 top
U$155  [##INT##7]  49.28,34.43 90 top
U$156  [#GPIO0#7]  46.74,34.42 90 top
U$157  [#GPIO1#7]  44.2,34.42 90 top
U$158  [#EN#6]  41.66,34.42 90 top
U$159  [TIME#OF#FLIGHT_TMF88018]  45.59,47.12 0 bottom
U$160  [#3#3V#1]  44.2,51.69 90 bottom
U$161  [#GND#0]  41.66,52.07 90 bottom
U$162  [#SDA#4]  46.74,52.07 90 bottom
U$163  [#SCL#5]  49.28,52.32 90 top
U$164  [#SCL#5]  49.28,52.32 90 bottom
U$165  [#EN#6]  41.66,34.42 90 bottom
U$166  [##INT##7]  49.28,34.42 90 bottom
U$167  [#GPIO0#7]  46.74,34.42 90 bottom
U$168  [#GPIO1#7]  44.2,34.42 90 bottom
U$169  [I�C0]  45.34,48.64 0 bottom
U$170  [LED1]  39.09,48.79 0 bottom
U$171  [PWR2]  39.24,51.82 0 top
U$172  [#INT0]  50.55,41.02 0 bottom
U$173  [TMF88010]  53.34,38.61 0 top
U$174  [TIME#OF#FLIGHT0]  53.34,39.88 0 top
U$175  [STAND-OFF]  81.53,55.63 0 top
U$176  [STAND-OFF]  61.21,55.63 0 top
U$177  [STAND-OFF]  61.21,35.31 0 top
U$178  [STAND-OFF]  81.53,35.31 0 top
U$179  [SPARKX-TINY]  61.42,40.82 0 top
U$180  [SPARKX-SMALL]  71.37,44.83 0 bottom
U$181  [#3#3V#1]  70.1,51.69 90 top
U$182  [#GND#0]  67.56,52.07 90 top
U$183  [#SDA#4]  72.64,52.07 90 top
U$184  [##INT##7]  75.19,34.43 90 top
U$185  [#GPIO0#7]  72.64,34.42 90 top
U$186  [#GPIO1#7]  70.1,34.42 90 top
U$187  [#EN#6]  67.56,34.42 90 top
U$188  [TIME#OF#FLIGHT_TMF88018]  71.5,47.12 0 bottom
U$189  [#3#3V#1]  70.1,51.69 90 bottom
U$190  [#GND#0]  67.56,52.07 90 bottom
U$191  [#SDA#4]  72.64,52.07 90 bottom
U$192  [#SCL#5]  75.18,52.32 90 top
U$193  [#SCL#5]  75.18,52.32 90 bottom
U$194  [#EN#6]  67.56,34.42 90 bottom
U$195  [##INT##7]  75.18,34.42 90 bottom
U$196  [#GPIO0#7]  72.64,34.42 90 bottom
U$197  [#GPIO1#7]  70.1,34.42 90 bottom
U$198  [I�C0]  71.25,48.64 0 bottom
U$199  [LED1]  65,48.79 0 bottom
U$200  [PWR2]  65.15,51.82 0 top
U$201  [#INT0]  76.45,41.02 0 bottom
U$202  [TMF88010]  79.25,38.61 0 top
U$203  [TIME#OF#FLIGHT0]  79.25,39.88 0 top
U$204  [STAND-OFF]  107.44,55.63 0 top
U$205  [STAND-OFF]  87.12,55.63 0 top
U$206  [STAND-OFF]  87.12,35.31 0 top
U$207  [STAND-OFF]  107.44,35.31 0 top
U$208  [SPARKX-TINY]  87.33,40.82 0 top
U$209  [SPARKX-SMALL]  97.28,44.83 0 bottom
U$210  [#3#3V#1]  96.01,51.69 90 top
U$211  [#GND#0]  93.47,52.07 90 top
U$212  [#SDA#4]  98.55,52.07 90 top
U$213  [##INT##7]  101.1,34.43 90 top
U$214  [#GPIO0#7]  98.55,34.42 90 top
U$215  [#GPIO1#7]  96.01,34.42 90 top
U$216  [#EN#6]  93.47,34.42 90 top
U$217  [TIME#OF#FLIGHT_TMF88018]  97.41,47.12 0 bottom
U$218  [#3#3V#1]  96.01,51.69 90 bottom
U$219  [#GND#0]  93.47,52.07 90 bottom
U$220  [#SDA#4]  98.55,52.07 90 bottom
U$221  [#SCL#5]  101.09,52.32 90 top
U$222  [#SCL#5]  101.09,52.32 90 bottom
U$223  [#EN#6]  93.47,34.42 90 bottom
U$224  [##INT##7]  101.09,34.42 90 bottom
U$225  [#GPIO0#7]  98.55,34.42 90 bottom
U$226  [#GPIO1#7]  96.01,34.42 90 bottom
U$227  [I�C0]  97.16,48.64 0 bottom
U$228  [LED1]  90.91,48.79 0 bottom
U$229  [PWR2]  91.06,51.82 0 top
U$230  [#INT0]  102.36,41.02 0 bottom
U$231  [TMF88010]  105.16,38.61 0 top
U$232  [TIME#OF#FLIGHT0]  105.16,39.88 0 top
U$233  [STAND-OFF]  29.72,81.53 0 top
U$234  [STAND-OFF]  9.4,81.53 0 top
U$235  [STAND-OFF]  9.4,61.21 0 top
U$236  [STAND-OFF]  29.72,61.21 0 top
U$237  [SPARKX-TINY]  9.6,66.73 0 top
U$238  [SPARKX-SMALL]  19.56,70.74 0 bottom
U$239  [#3#3V#1]  18.29,77.6 90 top
U$240  [#GND#0]  15.75,77.98 90 top
U$241  [#SDA#4]  20.83,77.98 90 top
U$242  [##INT##7]  23.38,60.34 90 top
U$243  [#GPIO0#7]  20.83,60.32 90 top
U$244  [#GPIO1#7]  18.29,60.32 90 top
U$245  [#EN#6]  15.75,60.32 90 top
U$246  [TIME#OF#FLIGHT_TMF88018]  19.68,73.03 0 bottom
U$247  [#3#3V#1]  18.29,77.6 90 bottom
U$248  [#GND#0]  15.75,77.98 90 bottom
U$249  [#SDA#4]  20.83,77.98 90 bottom
U$250  [#SCL#5]  23.37,78.23 90 top
U$251  [#SCL#5]  23.37,78.23 90 bottom
U$252  [#EN#6]  15.75,60.32 90 bottom
U$253  [##INT##7]  23.37,60.32 90 bottom
U$254  [#GPIO0#7]  20.83,60.32 90 bottom
U$255  [#GPIO1#7]  18.29,60.32 90 bottom
U$256  [I�C0]  19.43,74.55 0 bottom
U$257  [LED1]  13.18,74.7 0 bottom
U$258  [PWR2]  13.34,77.72 0 top
U$259  [#INT0]  24.64,66.93 0 bottom
U$260  [TMF88010]  27.43,64.52 0 top
U$261  [TIME#OF#FLIGHT0]  27.43,65.79 0 top
U$262  [STAND-OFF]  55.63,81.53 0 top
U$263  [STAND-OFF]  35.31,81.53 0 top
U$264  [STAND-OFF]  35.31,61.21 0 top
U$265  [STAND-OFF]  55.63,61.21 0 top
U$266  [SPARKX-TINY]  35.51,66.73 0 top
U$267  [SPARKX-SMALL]  45.47,70.74 0 bottom
U$268  [#3#3V#1]  44.2,77.6 90 top
U$269  [#GND#0]  41.66,77.98 90 top
U$270  [#SDA#4]  46.74,77.98 90 top
U$271  [##INT##7]  49.28,60.34 90 top
U$272  [#GPIO0#7]  46.74,60.32 90 top
U$273  [#GPIO1#7]  44.2,60.32 90 top
U$274  [#EN#6]  41.66,60.32 90 top
U$275  [TIME#OF#FLIGHT_TMF88018]  45.59,73.03 0 bottom
U$276  [#3#3V#1]  44.2,77.6 90 bottom
U$277  [#GND#0]  41.66,77.98 90 bottom
U$278  [#SDA#4]  46.74,77.98 90 bottom
U$279  [#SCL#5]  49.28,78.23 90 top
U$280  [#SCL#5]  49.28,78.23 90 bottom
U$281  [#EN#6]  41.66,60.32 90 bottom
U$282  [##INT##7]  49.28,60.32 90 bottom
U$283  [#GPIO0#7]  46.74,60.32 90 bottom
U$284  [#GPIO1#7]  44.2,60.32 90 bottom
U$285  [I�C0]  45.34,74.55 0 bottom
U$286  [LED1]  39.09,74.7 0 bottom
U$287  [PWR2]  39.24,77.72 0 top
U$288  [#INT0]  50.55,66.93 0 bottom
U$289  [TMF88010]  53.34,64.52 0 top
U$290  [TIME#OF#FLIGHT0]  53.34,65.79 0 top
U$291  [STAND-OFF]  81.53,81.53 0 top
U$292  [STAND-OFF]  61.21,81.53 0 top
U$293  [STAND-OFF]  61.21,61.21 0 top
U$294  [STAND-OFF]  81.53,61.21 0 top
U$295  [SPARKX-TINY]  61.42,66.73 0 top
U$296  [SPARKX-SMALL]  71.37,70.74 0 bottom
U$297  [#3#3V#1]  70.1,77.6 90 top
U$298  [#GND#0]  67.56,77.98 90 top
U$299  [#SDA#4]  72.64,77.98 90 top
U$300  [##INT##7]  75.19,60.34 90 top
U$301  [#GPIO0#7]  72.64,60.32 90 top
U$302  [#GPIO1#7]  70.1,60.32 90 top
U$303  [#EN#6]  67.56,60.32 90 top
U$304  [TIME#OF#FLIGHT_TMF88018]  71.5,73.03 0 bottom
U$305  [#3#3V#1]  70.1,77.6 90 bottom
U$306  [#GND#0]  67.56,77.98 90 bottom
U$307  [#SDA#4]  72.64,77.98 90 bottom
U$308  [#SCL#5]  75.18,78.23 90 top
U$309  [#SCL#5]  75.18,78.23 90 bottom
U$310  [#EN#6]  67.56,60.32 90 bottom
U$311  [##INT##7]  75.18,60.32 90 bottom
U$312  [#GPIO0#7]  72.64,60.32 90 bottom
U$313  [#GPIO1#7]  70.1,60.32 90 bottom
U$314  [I�C0]  71.25,74.55 0 bottom
U$315  [LED1]  65,74.7 0 bottom
U$316  [PWR2]  65.15,77.72 0 top
U$317  [#INT0]  76.45,66.93 0 bottom
U$318  [TMF88010]  79.25,64.52 0 top
U$319  [TIME#OF#FLIGHT0]  79.25,65.79 0 top
U$320  [STAND-OFF]  107.44,81.53 0 top
U$321  [STAND-OFF]  87.12,81.53 0 top
U$322  [STAND-OFF]  87.12,61.21 0 top
U$323  [STAND-OFF]  107.44,61.21 0 top
U$324  [SPARKX-TINY]  87.33,66.73 0 top
U$325  [SPARKX-SMALL]  97.28,70.74 0 bottom
U$326  [#3#3V#1]  96.01,77.6 90 top
U$327  [#GND#0]  93.47,77.98 90 top
U$328  [#SDA#4]  98.55,77.98 90 top
U$329  [##INT##7]  101.1,60.34 90 top
U$330  [#GPIO0#7]  98.55,60.32 90 top
U$331  [#GPIO1#7]  96.01,60.32 90 top
U$332  [#EN#6]  93.47,60.32 90 top
U$333  [TIME#OF#FLIGHT_TMF88018]  97.41,73.03 0 bottom
U$334  [#3#3V#1]  96.01,77.6 90 bottom
U$335  [#GND#0]  93.47,77.98 90 bottom
U$336  [#SDA#4]  98.55,77.98 90 bottom
U$337  [#SCL#5]  101.09,78.23 90 top
U$338  [#SCL#5]  101.09,78.23 90 bottom
U$339  [#EN#6]  93.47,60.32 90 bottom
U$340  [##INT##7]  101.09,60.32 90 bottom
U$341  [#GPIO0#7]  98.55,60.32 90 bottom
U$342  [#GPIO1#7]  96.01,60.32 90 bottom
U$343  [I�C0]  97.16,74.55 0 bottom
U$344  [LED1]  90.91,74.7 0 bottom
U$345  [PWR2]  91.06,77.72 0 top
U$346  [#INT0]  102.36,66.93 0 bottom
U$347  [TMF88010]  105.16,64.52 0 top
U$348  [TIME#OF#FLIGHT0]  105.16,65.79 0 top
U$349  [STAND-OFF]  29.72,107.44 0 top
U$350  [STAND-OFF]  9.4,107.44 0 top
U$351  [STAND-OFF]  9.4,87.12 0 top
U$352  [STAND-OFF]  29.72,87.12 0 top
U$353  [SPARKX-TINY]  9.6,92.63 0 top
U$354  [SPARKX-SMALL]  19.56,96.65 0 bottom
U$355  [#3#3V#1]  18.29,103.51 90 top
U$356  [#GND#0]  15.75,103.89 90 top
U$357  [#SDA#4]  20.83,103.89 90 top
U$358  [##INT##7]  23.38,86.25 90 top
U$359  [#GPIO0#7]  20.83,86.23 90 top
U$360  [#GPIO1#7]  18.29,86.23 90 top
U$361  [#EN#6]  15.75,86.23 90 top
U$362  [TIME#OF#FLIGHT_TMF88018]  19.68,98.93 0 bottom
U$363  [#3#3V#1]  18.29,103.51 90 bottom
U$364  [#GND#0]  15.75,103.89 90 bottom
U$365  [#SDA#4]  20.83,103.89 90 bottom
U$366  [#SCL#5]  23.37,104.14 90 top
U$367  [#SCL#5]  23.37,104.14 90 bottom
U$368  [#EN#6]  15.75,86.23 90 bottom
U$369  [##INT##7]  23.37,86.23 90 bottom
U$370  [#GPIO0#7]  20.83,86.23 90 bottom
U$371  [#GPIO1#7]  18.29,86.23 90 bottom
U$372  [I�C0]  19.43,100.46 0 bottom
U$373  [LED1]  13.18,100.61 0 bottom
U$374  [PWR2]  13.34,103.63 0 top
U$375  [#INT0]  24.64,92.84 0 bottom
U$376  [TMF88010]  27.43,90.42 0 top
U$377  [TIME#OF#FLIGHT0]  27.43,91.69 0 top
U$378  [STAND-OFF]  55.63,107.44 0 top
U$379  [STAND-OFF]  35.31,107.44 0 top
U$380  [STAND-OFF]  35.31,87.12 0 top
U$381  [STAND-OFF]  55.63,87.12 0 top
U$382  [SPARKX-TINY]  35.51,92.63 0 top
U$383  [SPARKX-SMALL]  45.47,96.65 0 bottom
U$384  [#3#3V#1]  44.2,103.51 90 top
U$385  [#GND#0]  41.66,103.89 90 top
U$386  [#SDA#4]  46.74,103.89 90 top
U$387  [##INT##7]  49.28,86.25 90 top
U$388  [#GPIO0#7]  46.74,86.23 90 top
U$389  [#GPIO1#7]  44.2,86.23 90 top
U$390  [#EN#6]  41.66,86.23 90 top
U$391  [TIME#OF#FLIGHT_TMF88018]  45.59,98.93 0 bottom
U$392  [#3#3V#1]  44.2,103.51 90 bottom
U$393  [#GND#0]  41.66,103.89 90 bottom
U$394  [#SDA#4]  46.74,103.89 90 bottom
U$395  [#SCL#5]  49.28,104.14 90 top
U$396  [#SCL#5]  49.28,104.14 90 bottom
U$397  [#EN#6]  41.66,86.23 90 bottom
U$398  [##INT##7]  49.28,86.23 90 bottom
U$399  [#GPIO0#7]  46.74,86.23 90 bottom
U$400  [#GPIO1#7]  44.2,86.23 90 bottom
U$401  [I�C0]  45.34,100.46 0 bottom
U$402  [LED1]  39.09,100.61 0 bottom
U$403  [PWR2]  39.24,103.63 0 top
U$404  [#INT0]  50.55,92.84 0 bottom
U$405  [TMF88010]  53.34,90.42 0 top
U$406  [TIME#OF#FLIGHT0]  53.34,91.69 0 top
U$407  [STAND-OFF]  81.53,107.44 0 top
U$408  [STAND-OFF]  61.21,107.44 0 top
U$409  [STAND-OFF]  61.21,87.12 0 top
U$410  [STAND-OFF]  81.53,87.12 0 top
U$411  [SPARKX-TINY]  61.42,92.63 0 top
U$412  [SPARKX-SMALL]  71.37,96.65 0 bottom
U$413  [#3#3V#1]  70.1,103.51 90 top
U$414  [#GND#0]  67.56,103.89 90 top
U$415  [#SDA#4]  72.64,103.89 90 top
U$416  [##INT##7]  75.19,86.25 90 top
U$417  [#GPIO0#7]  72.64,86.23 90 top
U$418  [#GPIO1#7]  70.1,86.23 90 top
U$419  [#EN#6]  67.56,86.23 90 top
U$420  [TIME#OF#FLIGHT_TMF88018]  71.5,98.93 0 bottom
U$421  [#3#3V#1]  70.1,103.51 90 bottom
U$422  [#GND#0]  67.56,103.89 90 bottom
U$423  [#SDA#4]  72.64,103.89 90 bottom
U$424  [#SCL#5]  75.18,104.14 90 top
U$425  [#SCL#5]  75.18,104.14 90 bottom
U$426  [#EN#6]  67.56,86.23 90 bottom
U$427  [##INT##7]  75.18,86.23 90 bottom
U$428  [#GPIO0#7]  72.64,86.23 90 bottom
U$429  [#GPIO1#7]  70.1,86.23 90 bottom
U$430  [I�C0]  71.25,100.46 0 bottom
U$431  [LED1]  65,100.61 0 bottom
U$432  [PWR2]  65.15,103.63 0 top
U$433  [#INT0]  76.45,92.84 0 bottom
U$434  [TMF88010]  79.25,90.42 0 top
U$435  [TIME#OF#FLIGHT0]  79.25,91.69 0 top
U$436  [STAND-OFF]  107.44,107.44 0 top
U$437  [STAND-OFF]  87.12,107.44 0 top
U$438  [STAND-OFF]  87.12,87.12 0 top
U$439  [STAND-OFF]  107.44,87.12 0 top
U$440  [SPARKX-TINY]  87.33,92.63 0 top
U$441  [SPARKX-SMALL]  97.28,96.65 0 bottom
U$442  [#3#3V#1]  96.01,103.51 90 top
U$443  [#GND#0]  93.47,103.89 90 top
U$444  [#SDA#4]  98.55,103.89 90 top
U$445  [##INT##7]  101.1,86.25 90 top
U$446  [#GPIO0#7]  98.55,86.23 90 top
U$447  [#GPIO1#7]  96.01,86.23 90 top
U$448  [#EN#6]  93.47,86.23 90 top
U$449  [TIME#OF#FLIGHT_TMF88018]  97.41,98.93 0 bottom
U$450  [#3#3V#1]  96.01,103.51 90 bottom
U$451  [#GND#0]  93.47,103.89 90 bottom
U$452  [#SDA#4]  98.55,103.89 90 bottom
U$453  [#SCL#5]  101.09,104.14 90 top
U$454  [#SCL#5]  101.09,104.14 90 bottom
U$455  [#EN#6]  93.47,86.23 90 bottom
U$456  [##INT##7]  101.09,86.23 90 bottom
U$457  [#GPIO0#7]  98.55,86.23 90 bottom
U$458  [#GPIO1#7]  96.01,86.23 90 bottom
U$459  [I�C0]  97.16,100.46 0 bottom
U$460  [LED1]  90.91,100.61 0 bottom
U$461  [PWR2]  91.06,103.63 0 top
U$462  [#INT0]  102.36,92.84 0 bottom
U$463  [TMF88010]  105.16,90.42 0 top
U$464  [TIME#OF#FLIGHT0]  105.16,91.69 0 top

## Library data of the parts
C1-C48 = SparkFun-Capacitors; PROD_ID: CAP-00810
D1-D16 = SparkFun-LED; PROD_ID: DIO-00819
E$1-E$4 FD1-FD64 = SparkFun-Aesthetics
E$5 E$6 = SparkFun-Retired
FRAME1-FRAME16 = SparkFun-Aesthetics; DESIGNER: Ricardo R; VERSION: v01
J1 J2 J7 J8 J11 J12 J15 J16 J19 J20 J23 J24 J27 J28 J31 J32 J35 J36 J39 J40 J43 J44 J47 J48 J51 J52 J55 J56 J59 J60 J63 J64 = SparkFun-Connectors; PROD_ID: CONN-13694
J3-J6 J9 J10 J13 J14 J17 J18 J21 J22 J25 J26 J29 J30 J33 J34 J37 J38 J41 J42 J45 J46 J49 J50 J53 J54 J57 J58 J61 J62 = SparkFun-Connectors; PROD_ID: CONN-09696
JP1-JP48 = SparkFun-Jumpers
R1 R2 R6 R7 R11 R12 R16 R17 R21 R22 R26 R27 R31 R32 R36 R37 R41 R42 R46 R47 R51 R52 R56 R57 R61 R62 R66 R67 R71 R72 R76 R77 = SparkFun-Resistors; PROD_ID: RES-08272
R3 R4 R8 R10 R13 R15 R18 R20 R23 R25 R28 R30 R33 R35 R38 R40 R43 R45 R48 R50 R53 R55 R58 R60 R63 R65 R68 R70 R73 R75 R78 R80 = SparkFun-Resistors; PROD_ID: RES-00824
R5 R9 R14 R19 R24 R29 R34 R39 R44 R49 R54 R59 R64 R69 R74 R79 = SparkFun-Resistors; PROD_ID: RES-07856
U1-U16 = local-ricardo
U$1-U$4 U$15 U$31-U$33 U$59-U$62 U$88-U$91 U$117-U$120 U$146-U$149 U$175-U$178 U$204-U$207 U$233-U$236 U$262-U$265 U$291-U$294 U$320-U$323 U$349-U$352 U$378-U$381 U$407-U$410 U$436-U$439 = SparkFun-Hardware
U$5-U$14 U$16-U$19 U$21-U$26 U$28-U$30 U$36-U$58 U$65-U$87 U$94-U$116 U$123-U$145 U$152-U$174 U$181-U$203 U$210-U$232 U$239-U$261 U$268-U$290 U$297-U$319 U$326-U$348 U$355-U$377 U$384-U$406 U$413-U$435 U$442-U$464 = output
U$20 U$27 U$34 U$35 U$63 U$64 U$92 U$93 U$121 U$122 U$150 U$151 U$179 U$180 U$208 U$209 U$237 U$238 U$266 U$267 U$295 U$296 U$324 U$325 U$353 U$354 U$382 U$383 U$411 U$412 U$440 U$441 = SparkX

## Nets
3.3V: C1.1 C2.1 C3.1 J1.2 J2.2 J3.2 JP1.2 JP3.2 R3.2 R4.2 U1.1 U1.7 U1.12
3.3V1: C4.1 C5.1 C6.1 J5.2 J7.2 J8.2 JP4.2 JP6.2 R8.2 R10.2 U2.1 U2.7 U2.12
3.3V2: C7.1 C8.1 C9.1 J9.2 J11.2 J12.2 JP7.2 JP9.2 R13.2 R15.2 U3.1 U3.7 U3.12
3.3V3: C10.1 C11.1 C12.1 J13.2 J15.2 J16.2 JP10.2 JP12.2 R18.2 R20.2 U4.1 U4.7 U4.12
3.3V4: C13.1 C14.1 C15.1 J17.2 J19.2 J20.2 JP13.2 JP15.2 R23.2 R25.2 U5.1 U5.7 U5.12
3.3V5: C16.1 C17.1 C18.1 J21.2 J23.2 J24.2 JP16.2 JP18.2 R28.2 R30.2 U6.1 U6.7 U6.12
3.3V6: C19.1 C20.1 C21.1 J25.2 J27.2 J28.2 JP19.2 JP21.2 R33.2 R35.2 U7.1 U7.7 U7.12
3.3V7: C22.1 C23.1 C24.1 J29.2 J31.2 J32.2 JP22.2 JP24.2 R38.2 R40.2 U8.1 U8.7 U8.12
3.3V8: C25.1 C26.1 C27.1 J33.2 J35.2 J36.2 JP25.2 JP27.2 R43.2 R45.2 U9.1 U9.7 U9.12
3.3V9: C28.1 C29.1 C30.1 J37.2 J39.2 J40.2 JP28.2 JP30.2 R48.2 R50.2 U10.1 U10.7 U10.12
3.3V10: C31.1 C32.1 C33.1 J41.2 J43.2 J44.2 JP31.2 JP33.2 R53.2 R55.2 U11.1 U11.7 U11.12
3.3V11: C34.1 C35.1 C36.1 J45.2 J47.2 J48.2 JP34.2 JP36.2 R58.2 R60.2 U12.1 U12.7 U12.12
3.3V12: C37.1 C38.1 C39.1 J49.2 J51.2 J52.2 JP37.2 JP39.2 R63.2 R65.2 U13.1 U13.7 U13.12
3.3V13: C40.1 C41.1 C42.1 J53.2 J55.2 J56.2 JP40.2 JP42.2 R68.2 R70.2 U14.1 U14.7 U14.12
3.3V14: C43.1 C44.1 C45.1 J57.2 J59.2 J60.2 JP43.2 JP45.2 R73.2 R75.2 U15.1 U15.7 U15.12
3.3V15: C46.1 C47.1 C48.1 J61.2 J63.2 J64.2 JP46.2 JP48.2 R78.2 R80.2 U16.1 U16.7 U16.12
!INT: J4.4 JP2.2 U1.4
!INT1: J6.4 JP5.2 U2.4
!INT2: J10.4 JP8.2 U3.4
!INT3: J14.4 JP11.2 U4.4
!INT4: J18.4 JP14.2 U5.4
!INT5: J22.4 JP17.2 U6.4
!INT6: J26.4 JP20.2 U7.4
!INT7: J30.4 JP23.2 U8.4
!INT8: J34.4 JP26.2 U9.4
!INT9: J38.4 JP29.2 U10.4
!INT10: J42.4 JP32.2 U11.4
!INT11: J46.4 JP35.2 U12.4
!INT12: J50.4 JP38.2 U13.4
!INT13: J54.4 JP41.2 U14.4
!INT14: J58.4 JP44.2 U15.4
!INT15: J62.4 JP47.2 U16.4
EN: J4.1 R3.1 U1.9
EN1: J6.1 R8.1 U2.9
EN2: J10.1 R13.1 U3.9
EN3: J14.1 R18.1 U4.9
EN4: J18.1 R23.1 U5.9
EN5: J22.1 R28.1 U6.9
EN6: J26.1 R33.1 U7.9
EN7: J30.1 R38.1 U8.9
EN8: J34.1 R43.1 U9.9
EN9: J38.1 R48.1 U10.9
EN10: J42.1 R53.1 U11.9
EN11: J46.1 R58.1 U12.9
EN12: J50.1 R63.1 U13.9
EN13: J54.1 R68.1 U14.9
EN14: J58.1 R73.1 U15.9
EN15: J62.1 R78.1 U16.9
GND: C1.2 C2.2 C3.2 D1.C J1.1 J2.1 J3.1 U1.2 U1.8 U1.11
GND1: C4.2 C5.2 C6.2 D2.C J5.1 J7.1 J8.1 U2.2 U2.8 U2.11
GND2: C7.2 C8.2 C9.2 D3.C J9.1 J11.1 J12.1 U3.2 U3.8 U3.11
GND3: C10.2 C11.2 C12.2 D4.C J13.1 J15.1 J16.1 U4.2 U4.8 U4.11
GND4: C13.2 C14.2 C15.2 D5.C J17.1 J19.1 J20.1 U5.2 U5.8 U5.11
GND5: C16.2 C17.2 C18.2 D6.C J21.1 J23.1 J24.1 U6.2 U6.8 U6.11
GND6: C19.2 C20.2 C21.2 D7.C J25.1 J27.1 J28.1 U7.2 U7.8 U7.11
GND7: C22.2 C23.2 C24.2 D8.C J29.1 J31.1 J32.1 U8.2 U8.8 U8.11
GND8: C25.2 C26.2 C27.2 D9.C J33.1 J35.1 J36.1 U9.2 U9.8 U9.11
GND9: C28.2 C29.2 C30.2 D10.C J37.1 J39.1 J40.1 U10.2 U10.8 U10.11
GND10: C31.2 C32.2 C33.2 D11.C J41.1 J43.1 J44.1 U11.2 U11.8 U11.11
GND11: C34.2 C35.2 C36.2 D12.C J45.1 J47.1 J48.1 U12.2 U12.8 U12.11
GND12: C37.2 C38.2 C39.2 D13.C J49.1 J51.1 J52.1 U13.2 U13.8 U13.11
GND13: C40.2 C41.2 C42.2 D14.C J53.1 J55.1 J56.1 U14.2 U14.8 U14.11
GND14: C43.2 C44.2 C45.2 D15.C J57.1 J59.1 J60.1 U15.2 U15.8 U15.11
GND15: C46.2 C47.2 C48.2 D16.C J61.1 J63.1 J64.1 U16.2 U16.8 U16.11
GPIO0: J4.3 U1.3
GPIO1: J4.2 U1.10
GPIO2: J6.2 U2.10
GPIO3: J6.3 U2.3
GPIO4: J10.2 U3.10
GPIO5: J10.3 U3.3
GPIO6: J14.2 U4.10
GPIO7: J14.3 U4.3
GPIO8: J18.2 U5.10
GPIO9: J18.3 U5.3
GPIO10: J22.2 U6.10
GPIO11: J22.3 U6.3
GPIO12: J26.2 U7.10
GPIO13: J26.3 U7.3
GPIO14: J30.2 U8.10
GPIO15: J30.3 U8.3
GPIO16: J34.2 U9.10
GPIO17: J34.3 U9.3
GPIO18: J38.2 U10.10
GPIO19: J38.3 U10.3
GPIO20: J42.2 U11.10
GPIO21: J42.3 U11.3
GPIO22: J46.2 U12.10
GPIO23: J46.3 U12.3
GPIO24: J50.2 U13.10
GPIO25: J50.3 U13.3
GPIO26: J54.2 U14.10
GPIO27: J54.3 U14.3
GPIO28: J58.2 U15.10
GPIO29: J58.3 U15.3
GPIO30: J62.2 U16.10
GPIO31: J62.3 U16.3
N$1: D1.A R5.1
N$2: JP1.3 R1.2
N$3: JP1.1 R2.2
N$4: JP3.1 R5.2
N$5: JP2.1 R4.1
N$6: JP6.3 R6.2
N$7: JP6.1 R7.2
N$8: D2.A R9.1
N$9: JP4.1 R9.2
N$10: JP5.1 R10.1
N$11: JP9.3 R11.2
N$12: JP9.1 R12.2
N$13: D3.A R14.1
N$14: JP7.1 R14.2
N$15: JP8.1 R15.1
N$16: JP12.3 R16.2
N$17: JP12.1 R17.2
N$18: D4.A R19.1
N$19: JP10.1 R19.2
N$20: JP11.1 R20.1
N$21: JP15.3 R21.2
N$22: JP15.1 R22.2
N$23: D5.A R24.1
N$24: JP13.1 R24.2
N$25: JP14.1 R25.1
N$26: JP18.3 R26.2
N$27: JP18.1 R27.2
N$28: D6.A R29.1
N$29: JP16.1 R29.2
N$30: JP17.1 R30.1
N$31: JP21.3 R31.2
N$32: JP21.1 R32.2
N$33: D7.A R34.1
N$34: JP19.1 R34.2
N$35: JP20.1 R35.1
N$36: JP24.3 R36.2
N$37: JP24.1 R37.2
N$38: D8.A R39.1
N$39: JP22.1 R39.2
N$40: JP23.1 R40.1
N$41: JP27.3 R41.2
N$42: JP27.1 R42.2
N$43: D9.A R44.1
N$44: JP25.1 R44.2
N$45: JP26.1 R45.1
N$46: JP30.3 R46.2
N$47: JP30.1 R47.2
N$48: D10.A R49.1
N$49: JP28.1 R49.2
N$50: JP29.1 R50.1
N$51: JP33.3 R51.2
N$52: JP33.1 R52.2
N$53: D11.A R54.1
N$54: JP31.1 R54.2
N$55: JP32.1 R55.1
N$56: JP36.3 R56.2
N$57: JP36.1 R57.2
N$58: D12.A R59.1
N$59: JP34.1 R59.2
N$60: JP35.1 R60.1
N$61: JP39.3 R61.2
N$62: JP39.1 R62.2
N$63: D13.A R64.1
N$64: JP37.1 R64.2
N$65: JP38.1 R65.1
N$66: JP42.3 R66.2
N$67: JP42.1 R67.2
N$68: D14.A R69.1
N$69: JP40.1 R69.2
N$70: JP41.1 R70.1
N$71: JP45.3 R71.2
N$72: JP45.1 R72.2
N$73: D15.A R74.1
N$74: JP43.1 R74.2
N$75: JP44.1 R75.1
N$76: JP48.3 R76.2
N$77: JP48.1 R77.2
N$78: D16.A R79.1
N$79: JP46.1 R79.2
N$80: JP47.1 R80.1
SCL: J1.4 J2.4 J3.4 R2.1 U1.5
SCL1: J5.4 J7.4 J8.4 R7.1 U2.5
SCL2: J9.4 J11.4 J12.4 R12.1 U3.5
SCL3: J13.4 J15.4 J16.4 R17.1 U4.5
SCL4: J17.4 J19.4 J20.4 R22.1 U5.5
SCL5: J21.4 J23.4 J24.4 R27.1 U6.5
SCL6: J25.4 J27.4 J28.4 R32.1 U7.5
SCL7: J29.4 J31.4 J32.4 R37.1 U8.5
SCL8: J33.4 J35.4 J36.4 R42.1 U9.5
SCL9: J37.4 J39.4 J40.4 R47.1 U10.5
SCL10: J41.4 J43.4 J44.4 R52.1 U11.5
SCL11: J45.4 J47.4 J48.4 R57.1 U12.5
SCL12: J49.4 J51.4 J52.4 R62.1 U13.5
SCL13: J53.4 J55.4 J56.4 R67.1 U14.5
SCL14: J57.4 J59.4 J60.4 R72.1 U15.5
SCL15: J61.4 J63.4 J64.4 R77.1 U16.5
SDA: J1.3 J2.3 J3.3 R1.1 U1.6
SDA1: J5.3 J7.3 J8.3 R6.1 U2.6
SDA2: J9.3 J11.3 J12.3 R11.1 U3.6
SDA3: J13.3 J15.3 J16.3 R16.1 U4.6
SDA4: J17.3 J19.3 J20.3 R21.1 U5.6
SDA5: J21.3 J23.3 J24.3 R26.1 U6.6
SDA6: J25.3 J27.3 J28.3 R31.1 U7.6
SDA7: J29.3 J31.3 J32.3 R36.1 U8.6
SDA8: J33.3 J35.3 J36.3 R41.1 U9.6
SDA9: J37.3 J39.3 J40.3 R46.1 U10.6
SDA10: J41.3 J43.3 J44.3 R51.1 U11.6
SDA11: J45.3 J47.3 J48.3 R56.1 U12.6
SDA12: J49.3 J51.3 J52.3 R61.1 U13.6
SDA13: J53.3 J55.3 J56.3 R66.1 U14.6
SDA14: J57.3 J59.3 J60.3 R71.1 U15.6
SDA15: J61.3 J63.3 J64.3 R76.1 U16.6